# Altium PCB Rigid-QFN-2.PcbDoc
Units mil, origin at the board's own origin, x right, y up, seen from the top; angles counter-clockwise.
Board outline 1000.01 x 1200 mil, 2 copper layers (Top Layer, Bottom Layer), stack 0.552 mil thick; 55 components, 23 nets, 162 pads, 43 vias.
Unrouted connection lines stored in the file: 38.
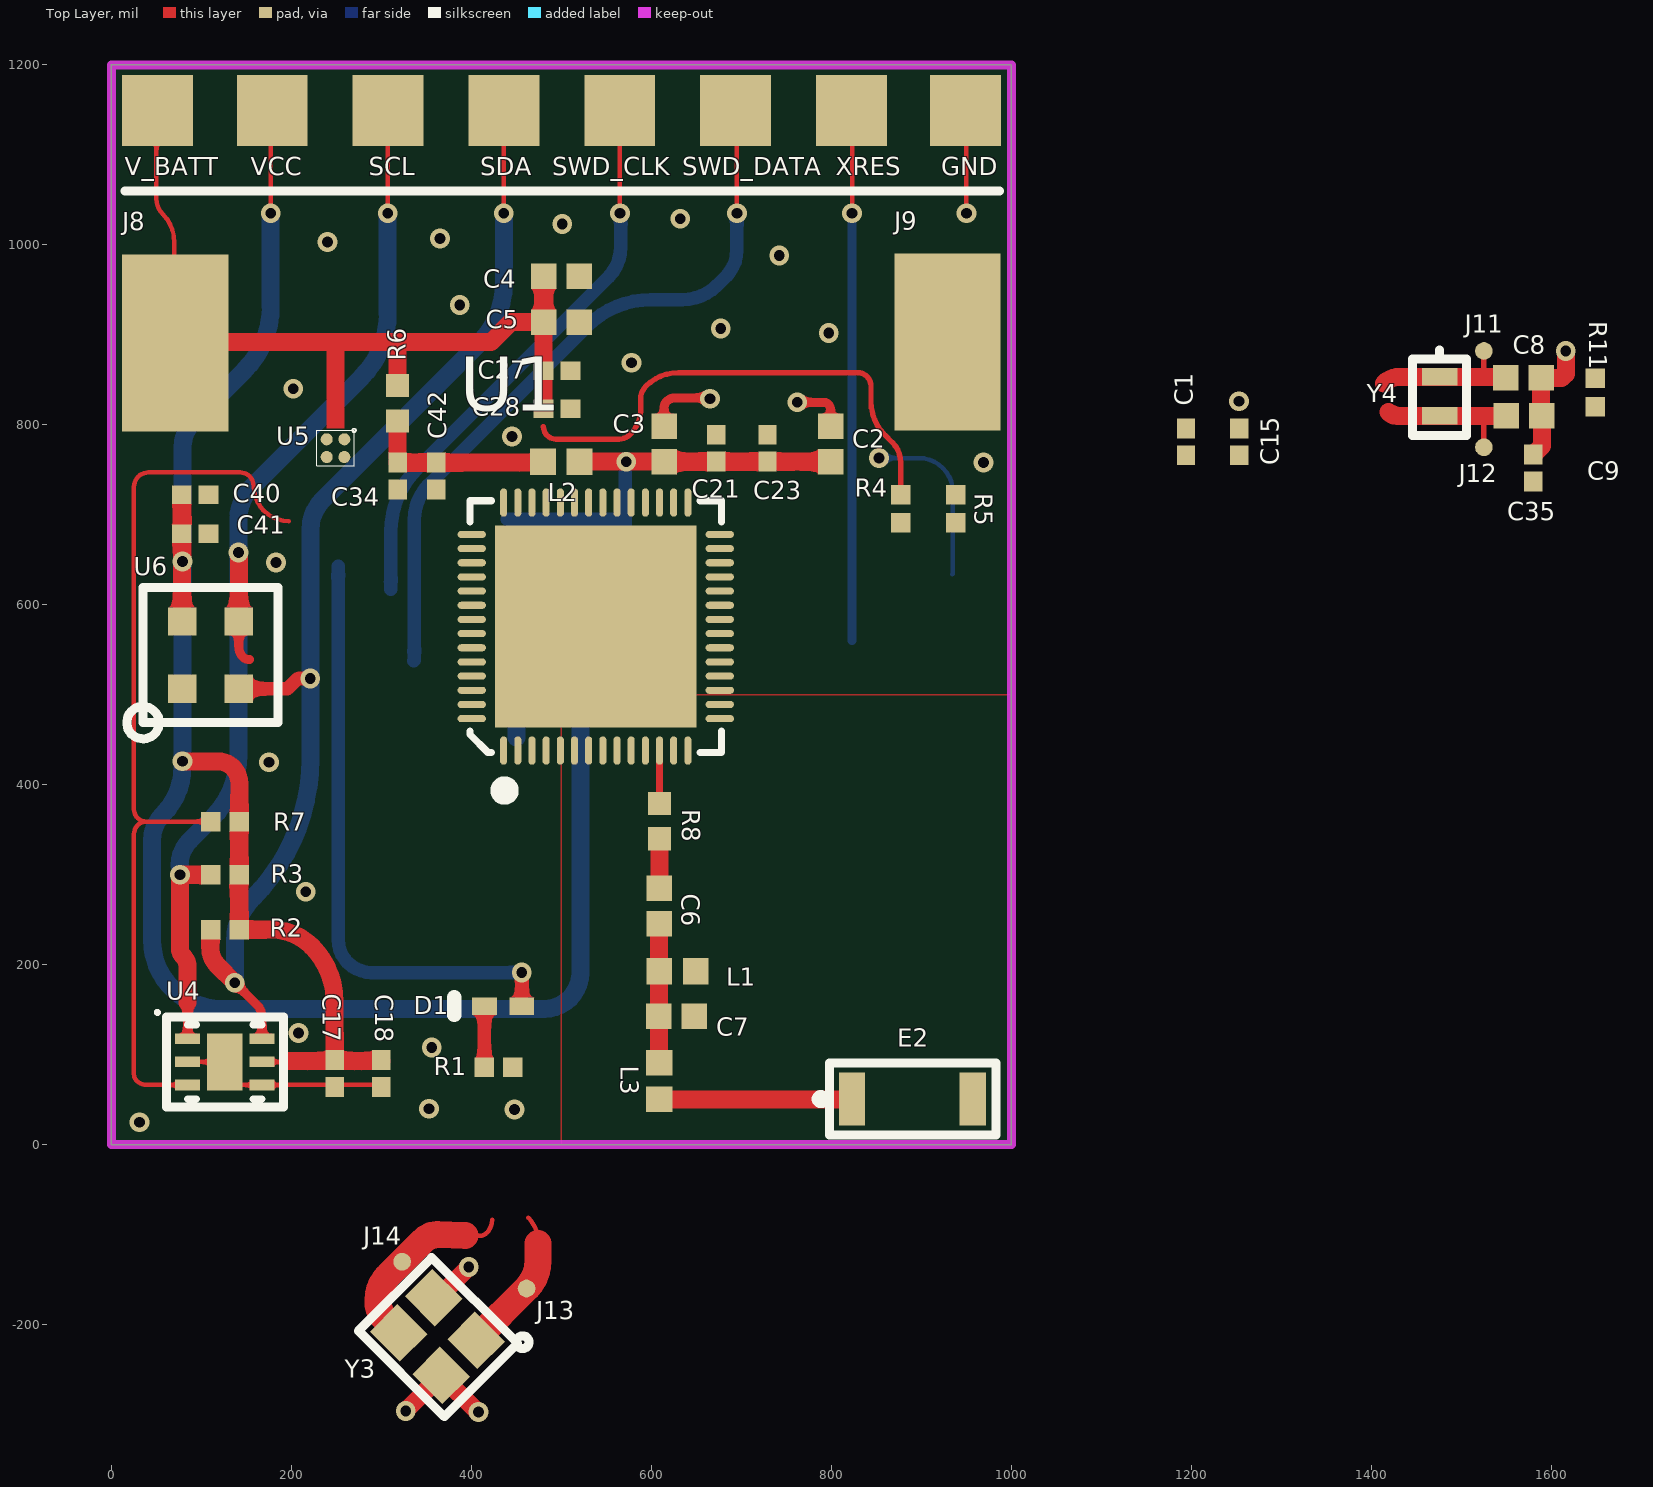
[diagram p0: Top Layer view]
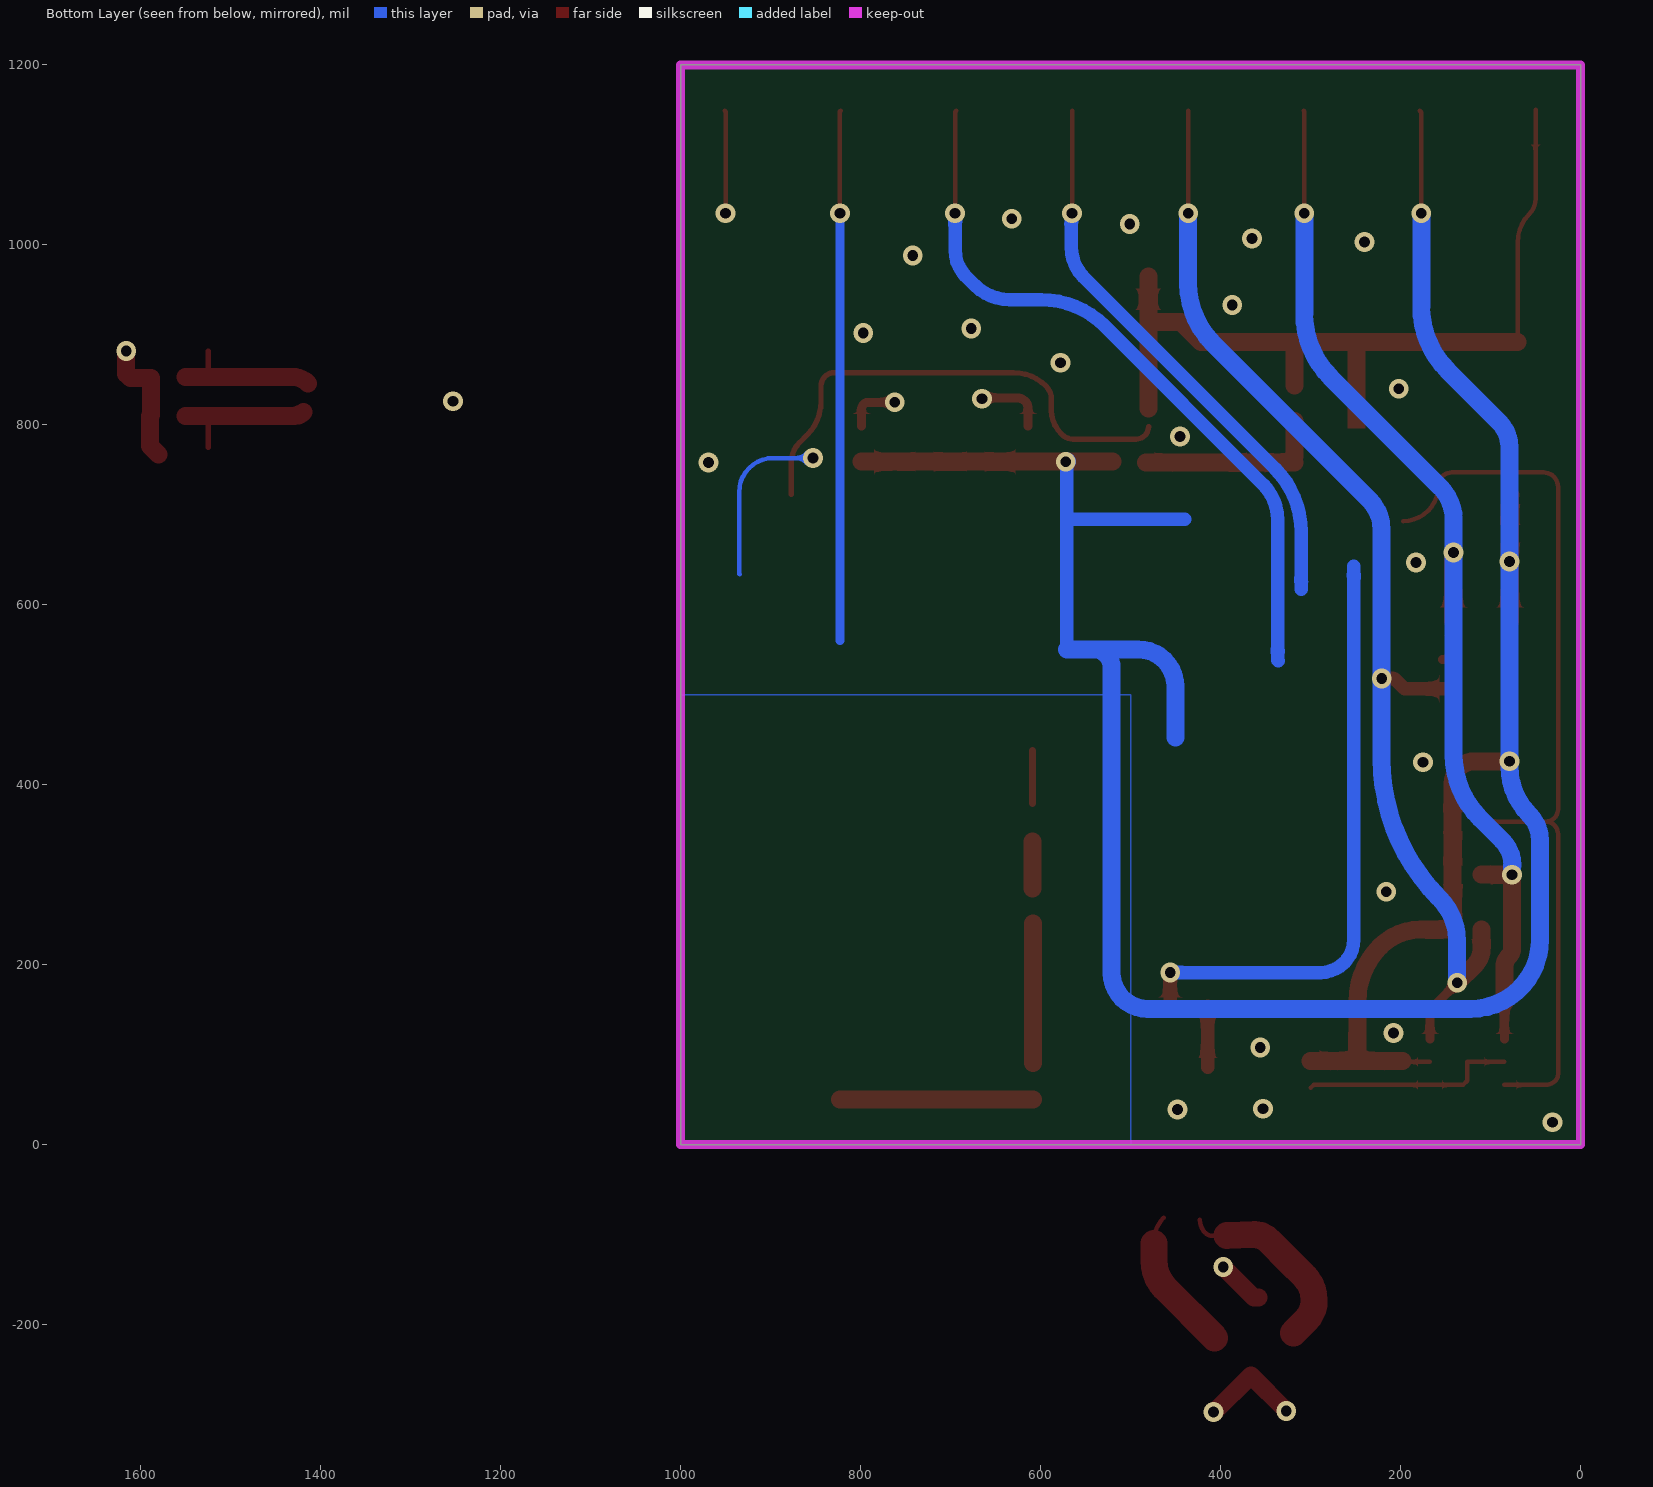
[diagram p1: Bottom Layer view, seen from below]

## Layer stack, top to bottom
Top Solder: solder mask 0.4, Solder Resist, Dk 3.5
Top Layer: signal copper 0.04
Dielectric1: dielectric 0.472, Polyimide, Dk 2.93
Bottom Layer: signal copper 0.04
Bottom Solder: solder mask 0.4, Solder Resist, Dk 3.5

## Board outline
0,0 1000.01,0 999.92,1200 0,1200

## Design rules (kind name [scope] priority, off if disabled: settings)
Clearance "pour clearance" [All] p1: gap=6 ignorepadtopadclearanceinfootprint=FALSE
Clearance [All] p2: gap=6 ignorepadtopadclearanceinfootprint=FALSE
ComponentClearance [All] p1: gap=5 collisioncheckmode=3 verticalgap=10 showdistances=FALSE
DiffPairsRouting [All] p1: maxlimit=10 minlimit=5 mostfreqgap=10 toplayer_minwidth=5 toplayer_maxwidth=35 toplayer_prefwidth=7.5 bottomlayer_minwidth=5 bottomlayer_maxwidth=35 bottomlayer_prefwidth=7.5 maxuncoupledlength=500
FabricationTestPointUsage TestPointUsage [All] p1: valid=0 allowmultiple=FALSE
FabricationTestpoint Testpoint [All] p1: side=3 testpointundercomponent=TRUE minsize=40 maxsize=100 preferedsize=60 minholesize=0 maxholesize=40 preferedholesize=32 testpointgrid=1 allowsidetop=TRUE allowsidebottom=TRUE usegrid=TRUE gridtolerance=0.01
HoleSize [All] p1: absolutevalues=TRUE maxlimit=100 minlimit=12 maxpercent=80.000 minpercent=20.000
HoleToHoleClearance [All] p1: gap=16 allowstackedmicrovias=TRUE
MinimumAnnularRing [All] p1: minimumring=5
MinimumSolderMaskSliver [All] p1: minsoldermaskwidth=4
PolygonConnect [All] p1: connectstyle=Relief reliefconductorwidth=10 reliefentries=4 polygonreliefangle="90 Angle" airgapwidth=10
RoutingCorners [All] p1: cornerstyle=45-Degree minsetback=5 maxsetback=30
RoutingVias [All] p1: holewidth=12 width=22 viastyle="Through Hole" minholewidth=6 minwidth=20 maxholewidth=28 maxwidth=25
SilkToSilkClearance [All] p1: silktosilkclearance=6
SilkToSolderMaskClearance SilkscreenOverComponentPads [IsPad] p1: minsilkscreentomaskgap=6 clearancetoexposedcopper=TRUE
SolderMaskExpansion [All] p1: expansion=3
UnRoutedNet [All] p1: checkbadconnections=TRUE
UnpouredPolygon [All] p1: allowshelved=TRUE
Width [All] p1: maxlimit=100 minlimit=6 preferedwidth=6 checkconnectedcopper=TRUE
18 further rules are at their usual default settings.

## Classes and differential pairs
differential pair XTAL_LF: +XTAL_LF_P -XTAL_LF_N
differential pair XTAL_HF: +XTAL_HF_P -XTAL_HF_N

## Components (designator, comment, footprint, x,y, rotation, side; value= is the part's Value field where it differs from the comment)
C1 "1uF" CAP_0201(0603)_M 1194,781.04 r270 top
C2 "10uF" CAP_0402(1005)_M 799,778.68 r90 top
C3 "10uF" CAP_0402(1005)_M 614,778.68 r90 top
C4 "10uF" CAP_0402(1005)_M 500,965 r0 top
C5 "10uF" CAP_0402(1005)_M 500,914 r0 top
C6 "0.5pF" CAP_0402(1005)_M 608.65,265.45 r270 top
C7 "2pF" CAP_0402(1005)_M 628,142.69 r0 top
C8 "39pF" CAP_0402(1005)_M 1569,852 r0 top
C9 "18pF" CAP_0402(1005)_M 1569.72,810 r0 top
C15 "1uF" CAP_0201(0603)_M 1253,781.04 r270 top
C17 "100nF" CAP_0201(0603)_M 248,79 r270 top
C18 "1uF" CAP_0201(0603)_M 300,79 r270 top
C21 "1uF" CAP_0201(0603)_M 672,773.96 r90 top
C23 "1uF" CAP_0201(0603)_M 729,773.96 r90 top
C27 "1uF" CAP_0201(0603)_M 494.96,860 r0 top
C28 "1uF" CAP_0201(0603)_M 494.96,818 r0 top
C34 "100nF" CAP_0201(0603)_M 318,743.04 r270 top
C35 "100pF" CAP_0201(0603)_M 1580,752 r90 top
C40 "1uF" CAP_0201(0603)_M 93,722 r180 top
C41 "100nF" CAP_0201(0603)_M 93,679 r180 top
C42 "1uF" CAP_0201(0603)_M 361,743.04 r270 top
D1 "Red" LED_0402(1005) 436,154 r180 top
E2 "2450AT18B100" 2450AT18B100 823,50.69 r0 top
GND "Probe-Pin Pad" Pogo-Pin-Pad 949,1149 r90 top
J8 "Battery_Connector" BATTERY_PAD 71,891 r0 top
J9 "Battery_Connector" BATTERY_PAD 929,892 r0 top
J11 "Probe-CLOCK" POGO-CLOCK-PAD 1525,882 r90 top
J12 "Probe-CLOCK" POGO-CLOCK-PAD 1525,775 r90 top
J13 "Probe-CLOCK" POGO-CLOCK-PAD 461.27,-159.73 r90 top
J14 "Probe-CLOCK" POGO-CLOCK-PAD 323,-130 r270 top
L1 "2nh" IND_0402(1005)_M 629,192.69 r180 top
L2 "1uh" IND_0402(1005)_M 499.75,759 r0 top
L3 "9nh" IND_0402(1005)_M 608.65,70.77 r270 top
R1 "270R" RES_0201(0603)_M 430.09,86 r0 top
R2 "4.7kR" RES_0201(0603)_M 126,239 r180 top
R3 "4.7kR" RES_0201(0603)_M 126,300 r180 top
R4 "100kR" RES_0201(0603)_M 877,706.75 r270 top
R5 "30kR" RES_0201(0603)_M 938,706.75 r90 top
R6 "0mR" RES_0402(1005)_M 318,823.69 r270 top
R7 "4.7kR" RES_0201(0603)_M 126.25,359 r0 top
R8 "0mR" RES_0402(1005)_M 609,359.69 r270 top
R11 "4.7kR" RES_0201(0603)_M 1649,836 r270 top
SCL "Probe-Pin Pad" Pogo-Pin-Pad 307.43,1149 r90 top
SDA "Probe-Pin Pad" Pogo-Pin-Pad 436.14,1149 r90 top
SWD_CLK "Probe-Pin Pad" Pogo-Pin-Pad 564.86,1149 r90 top
SWD_DATA "Probe-Pin Pad" Pogo-Pin-Pad 693.57,1149 r90 top
U1 "CY8C4247LQI-BL483" QFN40P700X700X60-57N 538.13,575.8 r90 top
U4 "TMP116" WSON-6 126,92 r0 top
U5 "ADP172" ADP172 249,774 r270 top locked
U6 "GUVB-C31SM" GUVB-C31SM 110,544 r180 top
V_BATT "Probe-Pin Pad" Pogo-Pin-Pad 51,1149 r90 top
VCC "Probe-Pin Pad" Pogo-Pin-Pad 178.71,1149 r90 top
XRES "Probe-Pin Pad" Pogo-Pin-Pad 822.29,1149 r90 top
Y3 "ECX-2236" ECX-2236 405.33,-217.33 r135 top
Y4 "32.768KHz" ABS05 1475.87,853.25 r270 top

## Footprints (in the part's own frame and the unit in brackets; to place one, negate y for a bottom-side part, rotate by r counter-clockwise, add the part's x,y. Pads: shape width x height; smd on the part's side, far side on the other; paste and mask are expansions set on the pad)
2450AT18B100 [mm] "2.4GHz Mini Antenna SMD, 50 ohm Resistence"
  rect 0.74x1.5 smd mask+0.03: 1(0,0) 2(3.406,0)
  silkscreen extent -1.02,-1.02 4.06,1.02, body extent -0.05,-0.9 3.35,0.9, height 1.4
ABS05 [mm] "32.768 kHz CRYSTAL 12.5 PF +/-20ppm"
  rect 0.5x1 smd mask+0.1: 1(0,0) 2(1.102,0)
  silkscreen extent -0.76,-0.76 1.65,0.76, body extent -0.25,-0.5 1.35,0.5, height 0.5
ADP172 [mm] "4-Ball WLCSP, CB-4-4"
  round 0.34 smd paste+0.01 mask+0.01: A1(-0.25,0.25) A2(0.25,0.25) B1(-0.25,-0.25) B2(0.25,-0.25)
  silkscreen extent -0.55,-0.53 0.5,0.58, body extent -0.48,-0.48 0.48,0.48, height 0.69
BATTERY_PAD [mm]
  rect 3x5 smd: 1(0,0)
CAP_0201(0603)_M [mm] "Chip Capacitor, Body 0.6x0.3mm, Height 0.33mm, IPC Low Density"
  rect 0.56x0.52 smd: 1(-0.38,0) 2(0.38,0)
  body extent -0.31,-0.17 0.32,0.16, height 0.33
CAP_0402(1005)_M [mm] "Chip Capacitor, Body 1.0x0.5mm, Height 0.6mm, IPC Low Density"
  rect 0.72x0.72 smd: 1(-0.5,0) 2(0.5,0)
  body extent -0.55,-0.3 0.55,0.3, height 0.6
ECX-2236 [mm] "48 MHz CRYSTAL 2.5X2.0mm"
  rect 1.2x1.1 smd mask+0.05: 1(0,0) 2(1.7,0) 4(0,1.4)
  rect 1.2x1.1 smd paste+0 mask+0.05: 3(1.7,1.4)
  silkscreen extent -1.14,-1.07 2.54,2.16, body extent -0.36,-0.24 2.14,1.76, height 0.8
GUVB-C31SM [mm]
  rect 0.8x0.8 smd: 1(0.8,0.95) 2(-0.8,0.95) 3(-0.8,-0.95) 4(0.8,-0.95)
  silkscreen extent -1.91,-1.91 2.36,2.36, body extent -1,-1.15 1,1.15, height 1.4
IND_0402(1005)_M [mm] "Chip Inductor, 2-Leads, Body 1.1x0.6mm, IPC Low Density"
  rect 0.73x0.74 smd: 1(-0.515,0) 2(0.515,0)
  body extent -0.55,-0.3 0.55,0.3, height 0.45
LED_0402(1005) [mm] "SMD, 2-Leads, Body 1x0.5mm"
  rect 0.7x0.5 smd: A(-0.508,0) K(0.55,0)
  silkscreen extent 1.4,-0.25 1.4,0.25, body extent -0.5,-0.25 0.5,0.25, height 0.6
POGO-CLOCK-PAD [mm]
  round 0.5 smd: 1(0,0)
Pogo-Pin-Pad [mm]
  rect 2x2 smd: 1(0,0)
QFN40P700X700X60-57N [mm]
  oval 0.8x0.2 smd mask+0: 1(-3.5,2.6) 2(-3.5,2.2) 3(-3.5,1.8) 4(-3.5,1.4) 5(-3.5,1) 6(-3.5,0.6) 7(-3.5,0.2) 8(-3.5,-0.2) 9(-3.5,-0.6) 10(-3.5,-1) 11(-3.5,-1.4) 12(-3.5,-1.8) 13(-3.5,-2.2) 14(-3.5,-2.6) 29(3.5,-2.6) 30(3.5,-2.2) 31(3.5,-1.8) 32(3.5,-1.4) 33(3.5,-1) 34(3.5,-0.6) 35(3.5,-0.2) 36(3.5,0.2) 37(3.5,0.6) 38(3.5,1) 39(3.5,1.4) 40(3.5,1.8) 41(3.5,2.2) 42(3.5,2.6)
  oval 0.2x0.8 smd mask+0: 15(-2.6,-3.5) 16(-2.2,-3.5) 17(-1.8,-3.5) 18(-1.4,-3.5) 19(-1,-3.5) 20(-0.6,-3.5) 21(-0.2,-3.5) 22(0.2,-3.5) 23(0.6,-3.5) 24(1,-3.5) 25(1.4,-3.5) 26(1.8,-3.5) 27(2.2,-3.5) 28(2.6,-3.5) 43(2.6,3.5) 44(2.2,3.5) 45(1.8,3.5) 46(1.4,3.5) 47(1,3.5) 48(0.6,3.5) 49(0.2,3.5) 50(-0.2,3.5) 51(-0.6,3.5) 52(-1,3.5) 53(-1.4,3.5) 54(-1.8,3.5) 55(-2.2,3.5) 56(-2.6,3.5)
  rect 5.7x5.7 smd paste-5.7 mask+0: 57(0,0)
  silkscreen extent -4.83,-3.55 3.55,3.55, body extent -3.55,-3.55 3.55,3.55, height 0.6
RES_0201(0603)_M [mm] "Chip Resistor, Body 0.6x0.3mm, IPC Low Density"
  rect 0.55x0.55 smd: 1(-0.4,0) 2(0.4,0)
  body extent -0.31,-0.16 0.31,0.16, height 0.3
RES_0402(1005)_M [mm] "Chip Resistor, 2-Leads, Body 1.05x0.55mm, IPC Low Density"
  rect 0.65x0.65 smd: 1(-0.5,0) 2(0.5,0)
  body extent -0.53,-0.28 0.53,0.28, height 0.4
WSON-6 [mm] "SON, 6-Leads, Body 2x2mm, Pitch 0.65mm, Thermal Pad 1X1.6mm"
  rect 0.7x0.3 smd: 1(-1.05,0.65) 2(-1.05,0) 3(-1.05,-0.65) 4(1.05,-0.65) 5(1.05,0) 6(1.05,0.65)
  rect 1x1.6 smd: 7(0,0)
  silkscreen extent -1.95,-1.27 1.65,1.45, body extent -1,-1 1,1, height 0.8

## Part data
C1 C15 C17 C18 C21 C23 C27 C28 C34 C35 C40 C41 C42: library part C-0201(0603), "___ OHM ___ mW 0201(0603) SMD"
C2 C3 C4 C5 C6 C7 C8 C9: library part C-0402(1005), "___ OHM ___ mW 0402(1005) SMD"
D1: library part LED_0402(1005), "LED, 0402(1005) SMD"
E2: "2.4 GHz BLE Antenna"
L1 L3: library part I-0402(1005)
L2: library part "Inductor Iron", "Magnetic-Core Inductor"
R1 R2 R3 R4 R5 R7 R11: library part R-0201(0603), "___ OHM ___ mW 0201(0603) SMD"
R6 R8: library part R-0402(1005), "___ OHM ___ mW 0402(1005) SMD"
U4: "TI Digital I2C Temperature Sensor"
U5: "3V LDO"
Y3: "24 MHz Crystal"
Y4: library part ABS05, "Crystal Oscillator"

## Via types
v1: diameter 22, hole 12, Top Layer to Bottom Layer, 43 vias

## Nets (pads, with @x,y where several pads share a name; then routed paths per layer and width w, separated by ;. In a path a pad name is that pad's centre, name@x,y a point inside that pad or via, vN(x,y) a via of type N, cw(c..) or ccw(c..) an arc to the next point about the centre after c; other vN are vias at no path point)
ALERT: R7.1 U1.40 U4.3 | length 1018.1
  Top Layer w5: U4.3 39.08,66.41 cw(c39.08,82.08) 28,71 cw(c35.24,78.24) 25,78.24 25,345.34 cw(c38.66,345.34) 29,355 cw(c38.66,345.34) 38.66,359 ; R7.1 38.66,359 ; 197,693 cw(c197,732) 158,732 ccw(c143,732) 143,747 41,747 ccw(c41,731) 25,731 25,372.66 ccw(c38.66,372.66) 38.66,359
ANTENNA: R8.1 U1.12 | length 58.6
  Top Layer w8: R8.1 U1.12
BATTERY_LEVEL: R4.2 R5.1 U1.54
GND: C1.2 C2.2 C3.2 C4.2 C5.2 C7.2 C8.2 C9.2 C15.2 C17.2 C18.2 C21.2 C23.2 C27.2 C28.2 C34.2 C35.2 C40.1 C41.1 C42.2 GND.1 J9.1 L1.1 R1.2 R5.2 U1.9 U1.11 U1.13 U1.15 U1.18 U1.23 U1.55 U1.57 U4.2 U4.4 U4.7 U5.B2 U6.1 Y3.2 Y3.4 | length 804.7
  Top Layer w5: U4.2 U4.7 126,71 130.59,66.41 U4.4 296.63,66.41 C18.2@300,63.04 ; v1@950,1034 950,1148 GND.1@951,1149
  Top Layer w10: C3.2 614,818 cw(c626,818) 626,830 664,830 cw(c664,829) v1(665,829) ; v1(762,825) 791,825 cw(c791,817) 799,817 C2.2
  Top Layer w20: v1(327,-296) 327,-295.65 Y3.4 407.05,-297 v1(408,-297) ; Y3.2 363,-170 v1(397,-136) ; C35.2 1589.41,776.37 C9.2 1588.69,810.72 C8.2 1611.41,852 1616,856.59 v1(1616,881.9)
  other v1: 31,25 448,39 353,40 356,108 208,124 216,281 175,425 183,647 969,758 445,787 202,840 578,869 797,902 677,907 387,933 742,988 240,1003 365,1007 501,1023 632,1029 950,1035
LED_RED: D1.A U1.35 | length 677.3
  Top Layer w15: D1.A v1(456,191.35)
  Bottom Layer w15: 252,643 252,228 ccw(c288.65,228) 288.65,191.35 v1(456,191.35)
NetC6_1: C6.1 R8.2 | length 52
  Top Layer w20: C6.1@609,284.69 R8.2@609,336.69
NetC6_2: C6.2 C7.1 L1.2 L3.1 | length 154.7
  Top Layer w20: L3.1 C6.2
NetC34_1: C34.1 C42.1 L2.1 R6.2 U5.A2 | length 211.6
  Top Layer w5: C34.1 C34.1@318,764.16 ; L2.1@483,758 L2.1@484,759
  Top Layer w20: C34.1 C42.1 L2.1@483,758 ; C34.1@318,765 R6.2
NetD1_K: D1.K R1.1 | length 68
  Top Layer w15: R1.1 D1.K
NetE2_1: E2.1 L3.2 | length 214.2
  Top Layer w20: L3.2 E2.1@822.81,50.49
SCL: R3.2 SCL.1 U1.20 U4.1 U6.3 | length 1278
  Top Layer w5: v1@307,1034 307,1148.57 SCL.1
  Top Layer w10: U4.1 84.66,158 ; U6.3 141.5,552.87 ccw(c156.87,552.87) 146,542 ccw(c153.24,549.24) 153.24,539
  Top Layer w20: 84.66,158 84.66,197.75 ccw(c68.75,197.75) 80,209 cw(c89.66,218.66) 76,218.66 v1(76,300) R3.2 ; U6.3 v1@141.5,658
  Bottom Layer w20: v1(76,300) 76,309.74 75.5,310.24 cw(c114.76,310.24) 87,338 111.71,362.71 ccw(c41,433.42) 141,433.42 v1(141,658) 141,694.79 cw(c192.21,694.79) 155.99,730.99 277.71,852.71 ccw(c207,923.42) 307,923.42 v1(307,1035)
SDA: R2.2 SDA.1 U1.19 U4.6 U6.2 | length 1305.7
  Top Layer w5: v1(221,518) cw(c223.41,515.59) v1@223.41,519 ; v1@436,1034 436,1148.86 SDA.1
  Top Layer w10: v1(137,180) 161.92,155.08 cw(c148.84,142) 167.34,142 U4.6
  Top Layer w15: U6.2 195.6,506.6 207,518 v1(221,518)
  Top Layer w20: R2.2 110,238.75 110,218 ccw(c136.56,218) 117.78,199.22 v1(137,180)
  Bottom Layer w20: v1(137,180) 137,225.72 cw(c205.28,225.72) 157,274 ccw(c2.49,428.51) 221,428.51 v1(221,518) 221,683 cw(c269.28,683) 235.14,717.14 408.42,890.42 ccw(c341.85,957) 436,957 v1(436,1035)
SWD_CLK: SWD_CLK.1 U1.27 | length 632.8
  Top Layer w5: SWD_CLK.1 565,1148.86 v1@565,1034
  Bottom Layer w15: 310.5,617 310.5,681.08 cw(c410.5,681.08) 339.79,751.79 551.86,963.86 ccw(c517.72,998) 566,998 566,1032.59 ccw(c562.59,1032.59) v1(565,1035)
SWD_DATA: SWD_DATA.1 U1.26 | length 808.4
  Top Layer w5: SWD_DATA.1 695,1147.57 v1@695,1034
  Bottom Layer w15: 336,538 336.5,538.5 336.5,694.17 cw(c392.83,694.17) 353,734 528.71,909.71 cw(c599.42,839) 599.42,939 634.37,939 ccw(c634.37,993.63) 673,955 682.98,964.98 ccw(c653.96,994) 695,994 v1(695,1035)
V_BATT: C4.1 C5.1 C27.1 C28.1 J8.1 R4.1 R6.1 U5.A1 U5.B1 V_BATT.1 | length 1435.9
  Top Layer w5: V_BATT.1@50,1150 50,1050.9 ccw(c73.9,1050.9) 57,1034 cw(c25.62,1002.62) 70,1002.62 J8.1@70,892 ; 239,892 239.16,892 ; 258.84,892 259,892
  Top Layer w6: 480,798 ccw(c494,798) 494,784 563.93,784 ccw(c563.93,801.07) 576,789 577.39,790.39 ccw(c551.79,816) 588,816 588,828.51 cw(c608.49,828.51) 594,843 cw(c630.21,806.79) 630.21,858 829,858 cw(c829,843) 844,843 844,826 ccw(c897.11,826) 859.55,788.45 868,780 cw(c846.27,758.27) 877,758.27 R4.1
  Top Layer w20: J8.1@70,892 239,892 ; 239.16,892 258.84,892 ; 259,892 318,892 ; R6.1 318,892 ; C28.1 C27.1 C5.1@480,914 ; C4.1 C5.1 444,914 422,892 318,892
VCC: C2.1 C3.1 C17.1 C18.1 C21.1 C23.1 C40.2 C41.2 L2.2 R2.1 R3.1 R7.2 R11.1 U1.1 U1.10 U1.14 U1.36 U1.46 U1.56 U4.5 U6.4 VCC.1 | length 3430.1
  Top Layer w5: C41.2 C41.2@78.5,678.54 ; U4.5 195.68,92 ccw(c195.68,95.28) 198,92.96 ; v1@177,1034 177,1147.29 VCC.1
  Top Layer w20: C40.2 78.5,721.54 78.5,678.54 U6.4 ; v1(79,426) 118.1,426 cw(c118.1,402.1) 135,419 cw(c118.1,402.1) 142,402.1 R7.2 R2.1@142,239 ; R2.1 R2.1@142,239 ; 198,92.96 C18.1@300,92.96 ; C17.1 248,159 ccw(c161.09,159) 222.54,220.46 ccw(c177.77,175.69) 177.77,239 R2.1@142,239 ; L2.2 v1(572,759) C3.1 C21.1 C23.1 C2.1
  Bottom Layer w15: 440,695 570.8,695 ; 570.8,550.5 570.8,695 ; v1@570.8,759 570.8,695
  Bottom Layer w20: v1(177,1035) 177,931.17 cw(c77,931.17) 147.71,860.46 91,803.75 ccw(c119.97,774.78) 79,774.78 v1(79,648) v1(79,426) 79,420.11 cw(c3.89,420.11) 57,367 ccw(c85.97,338.03) 45,338.03 45,228 ccw(c122,228) 122,151 481,151 ccw(c481,191) 521,191 521,461 521,530 cw(c542,530) 537.46,550.5 ; 450.25,452.25 450.25,509 cw(c491.76,509) 491.76,550.5 537.46,550.5 ; 570.8,550.5 537.46,550.5 ; v1@570.8,759 v1(572,759)
VCCD: C1.1
VREF: C15.1 U1.45 | length 195.3
  Bottom Layer w5: v1(853,763) 897,763 cw(c897,725) 935,725 935,635 cw(c934,635) 934,634
  other v1: 1253,826.04
XRES: C35.1 R11.2 U1.4 XRES.1 | length 590.3
  Top Layer w5: XRES.1 823,1148.29 v1@823,1034
  Bottom Layer w10: 823,560 v1(823,1035)
XTAL_HF_N: J14.1 U1.17 Y3.3 | length 219.1
  Top Layer w5: 393,-101 409.76,-101 ccw(c409.76,-90.76) 417,-98 ccw(c402.51,-83.51) 423,-83.51
  Top Layer w30: Y3.3@305.14,-195.09 cw(c327.26,-173) 296,-173 cw(c334.63,-173) 307.31,-145.69 J14.1 346.48,-106.52 cw(c362.22,-122.26) 362.22,-100 393,-101 ; Y3.3@305.16,-195.11 Y3.3
XTAL_HF_P: J13.1 U1.16 Y3.1 | length 165.7
  Top Layer w5: Y3.1 cw(c409.31,-217.33) Y3.1@406.49,-214.51 ; 463,-81 cw(c436.44,-107.56) 474,-107.56 474,-110
  Top Layer w30: Y3.1@406.49,-214.51 J13.1 ccw(c430.54,-129) 474,-129 474,-110
XTAL_LF_N: C9.1 J12.1 U1.3 Y4.2 | length 178
  Top Layer w5: 1525,809.85 1525,810
  Top Layer w6: J12.1 1525,809.85
  Top Layer w20: 1525,809.85 Y4.2 1429.01,809.85 ; 1525,810 C9.1 ; 1429.01,809.85 cw(c1429.01,824.01) 1419,814 1429.01,809.85
XTAL_LF_P: C8.1 J11.1 U1.2 Y4.1 | length 168.7
  Top Layer w5: C8.1@1548.23,853.25 ccw(c1548.23,855.81) C8.1@1550.04,854
  Top Layer w6: 1525,853.25 J11.1
  Top Layer w20: 1414,846 cw(c1431.51,828.49) 1431.51,853.25 Y4.1 1525,853.25 C8.1@1550.04,853.25
pads on no net: E2.2 U1.5 U1.6 U1.7 U1.8 U1.21 U1.22 U1.24 U1.25 U1.28 U1.29 U1.30 U1.31 U1.32 U1.33 U1.34 U1.37 U1.38 U1.39 U1.41 U1.42 U1.43 U1.44 U1.47 U1.48 U1.49 U1.50 U1.51 U1.52 U1.53

## Polygon pours and split planes (outlines as drawn)
GND on Top Layer "GND_TOP" (hatched 45Degree grid 15 track 5, remove dead copper, shelved, pour order 1004): 0,0 0,1200 1000,1200 1000,500 500,500 500,0
GND on Top Layer "RF_GND_TOP" (solid, remove dead copper, shelved, pour order 1012): 500,0 500,500 1000,500 1000,0
GND on Bottom Layer "GND_BOTTOM" (hatched 45Degree grid 15 track 5, remove dead copper, shelved, pour order 1008): 0,0 0,1200 1000,1200 1000,500 500,500 500,0
GND on Bottom Layer "RF_GND_BOTTOM" (solid, remove dead copper, shelved, pour order 1016): 500,0 500,500 1000,500 1000,0

## Keep-outs
Keep-Out Layer:
  the board outline again, w10

## Other copper
Top Layer:
  rectangle net V_BATT: 239.16,796 259,892
  pour cut-out: 1398,919 1566,919 1566,764 1396.8,764 1396.8,774.5
  pour cut-out: 1000,0 775,0 775,225 1000,225
  pour cut-out: 506,-60 241,-60 241,-310 506,-310
Bottom Layer:
  pour cut-out: 1000,0 775,0 775,225 1000,225

## Silkscreen, mask and mechanical layers (free items; w line width, h text height)
Top Overlay:
  lines w10: 15,1060 987,1060
Mechanical 1:
  lines w3.94: 0,1000 0,-0.06 1000,-0.06 1000,1000
  lines w4: 0,1000 1000,1000
Mechanical 3:
  the board outline again, w10